# Altium PCB DDAQ.PcbDoc (part 1 of 2)
Units mil, origin at the board's own origin, x right, y up, seen from the top; angles counter-clockwise.
Board outline 3460 x 3375 mil, 2 copper layers (Top Layer, Bottom Layer); 150 components, 168 nets, 579 pads, 171 vias.
Unrouted connection lines stored in the file: 4.
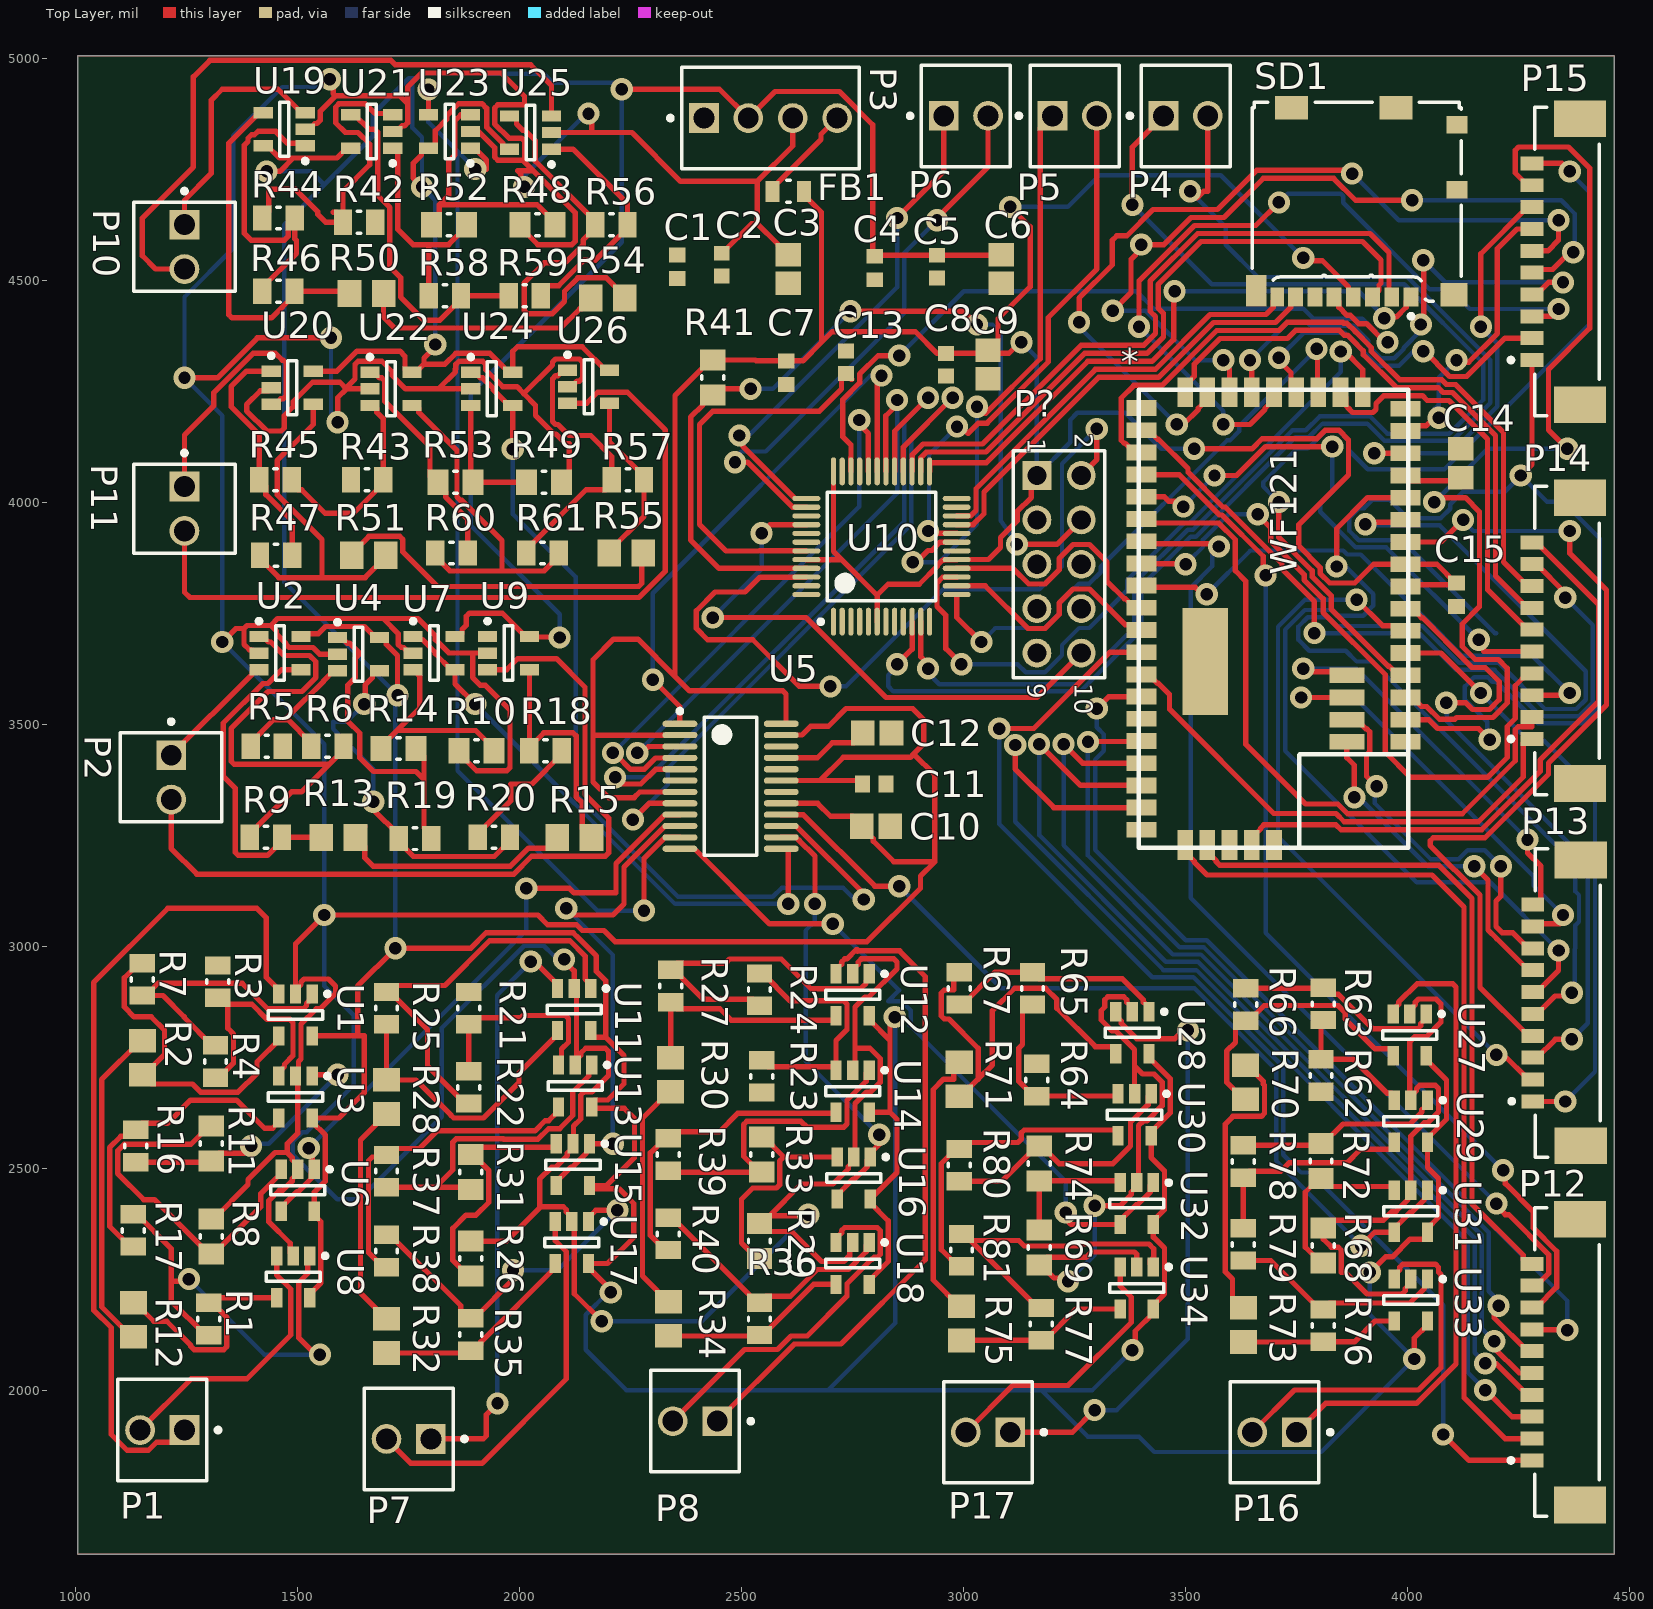
[diagram p0: Top Layer view]
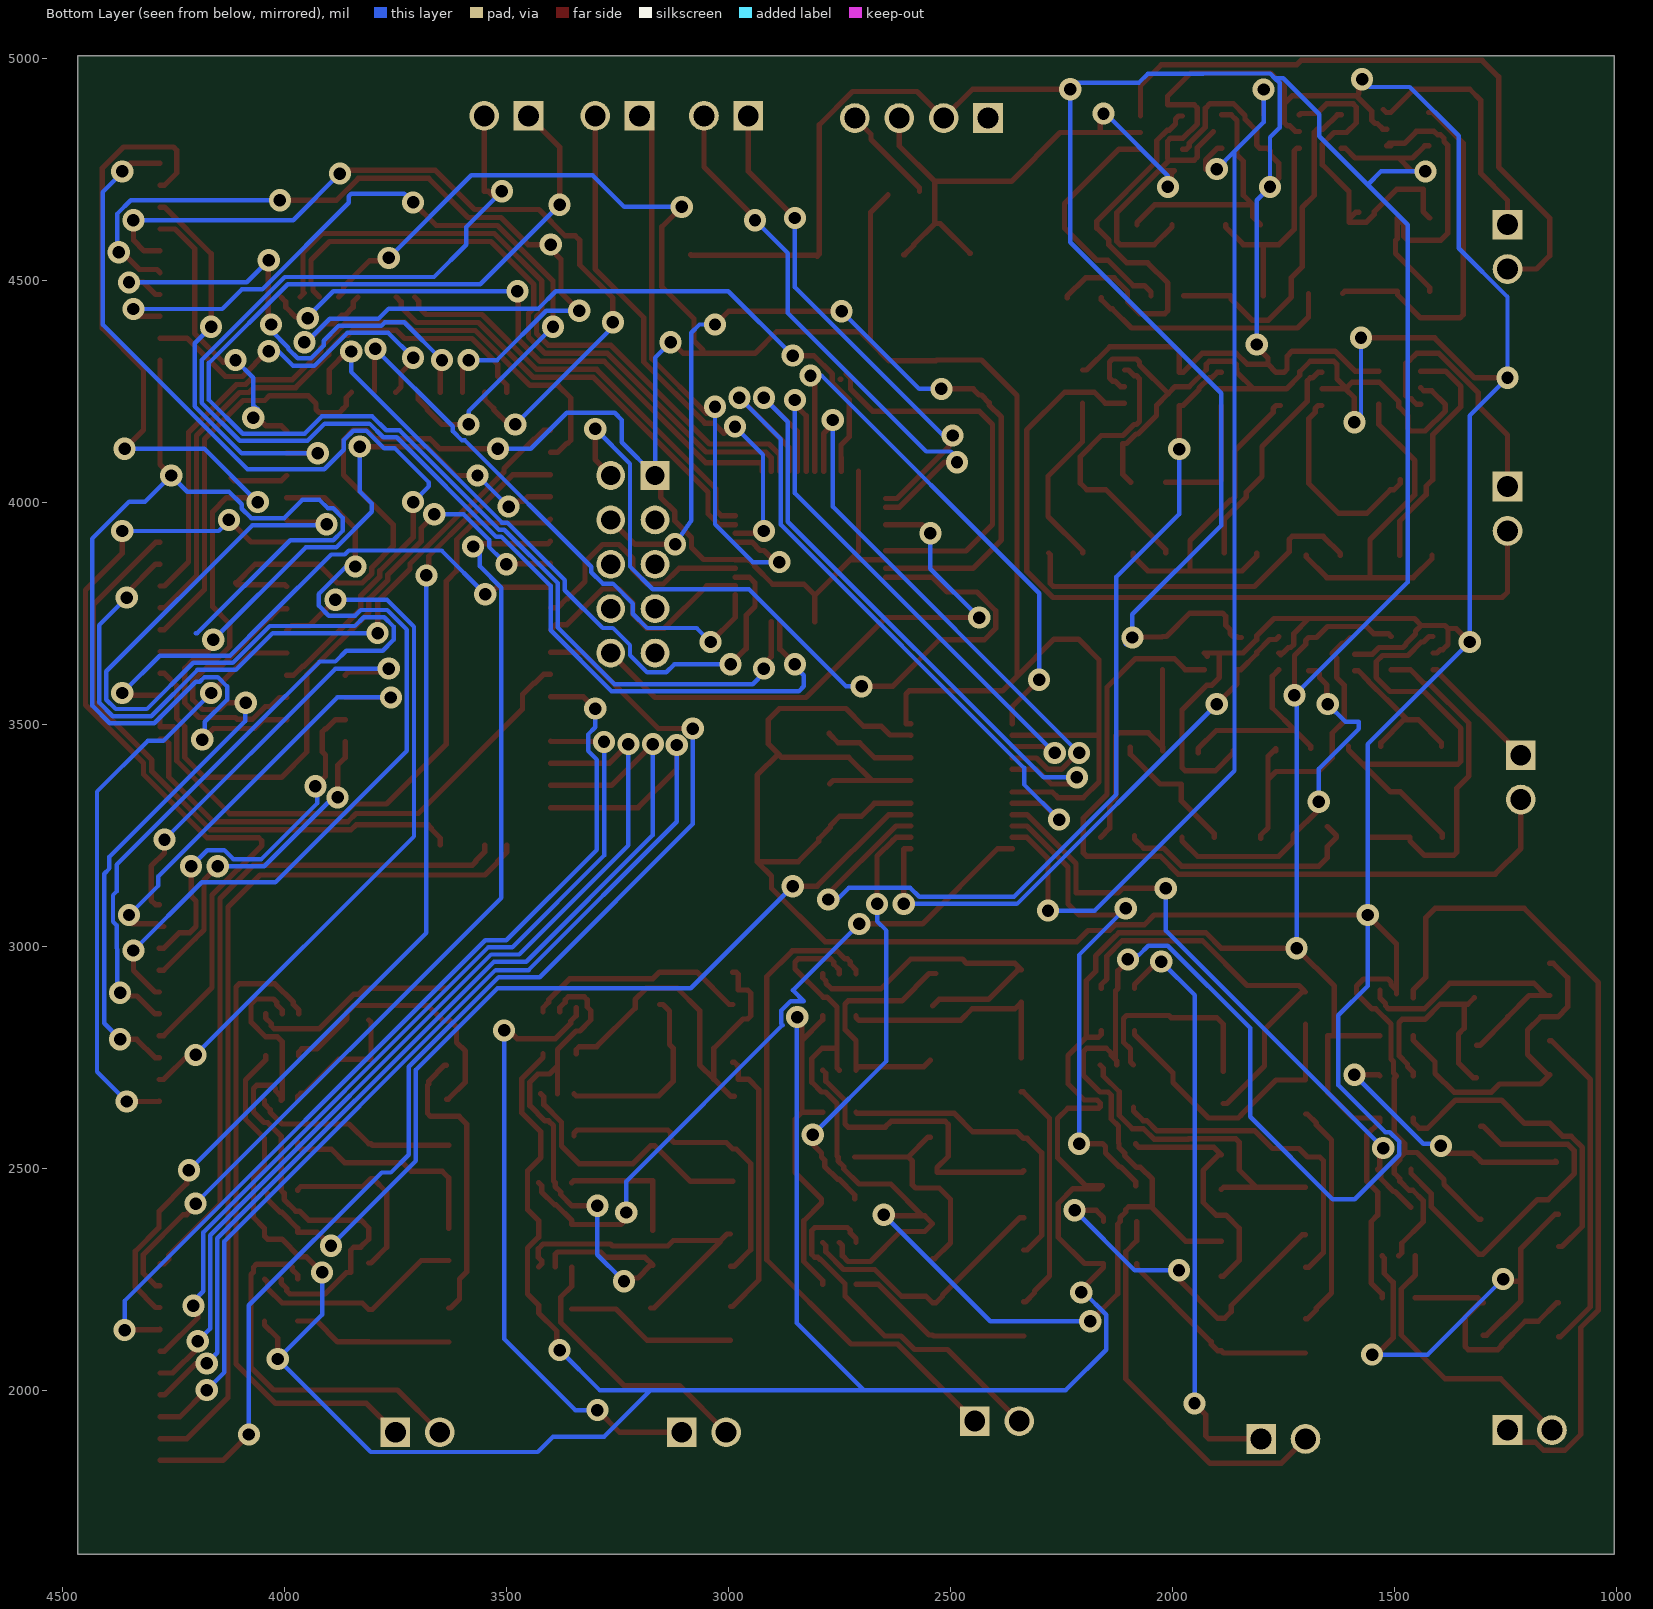
[diagram p1: Bottom Layer view, seen from below]

## Layer stack, top to bottom
Top Solder: solder mask 0.4, Solder Resist, Dk 3.5
Top Layer: signal copper 1.4
Dielectric 1: dielectric 12.6, FR-4, Dk 4.8
Bottom Layer: signal copper 1.4
Bottom Solder: solder mask 0.4, Solder Resist, Dk 3.5

## Board outline
1005,1630 4465,1630 4465,5005 1005,5005
cut-out: 4605,3700
cut-out: 1005,5005

## Design rules (kind name [scope] priority, off if disabled: settings)
Clearance [All] p1: gap=6 ignorepadtopadclearanceinfootprint=TRUE except(0: Arc-Hole Track-Hole SMDPad-Hole THPad-Hole Via-Hole Fill-Hole Poly-Hole Region-Hole Text-Hole; 1: SMDPad-SMDPad SMDPad-THPad SMDPad-Via SMDPad-Text THPad-THPad THPad-Via THPad-Text Via-Via Via-Text Fill-Text Poly-Text Region-Text Text-Text)
ComponentClearance [All] p1: gap=10 collisioncheckmode=3 verticalgap=100000 showdistances=FALSE
PolygonConnect [All] p1: connectstyle=Relief reliefconductorwidth=10 reliefentries=4 polygonreliefangle="90 Angle" airgapwidth=10
RoutingVias [All] p1: holewidth=28 width=50 viastyle="Through Hole" minholewidth=28 minwidth=50 maxholewidth=28 maxwidth=50
SolderMaskExpansion [All] p1: expansion=4
UnRoutedNet [All] p1: checkbadconnections=TRUE
Width [All] p1: maxlimit=20 minlimit=6 preferedwidth=12 bottomlayer_maxwidth=10 bottomlayer_prefwidth=10 minimp=50.000000 maximp=50.000000 favimp=50.000000
28 further rules are at their usual default settings.

## Components (designator, comment, footprint, x,y, rotation, side; value= is the part's Value field where it differs from the comment)
* "WF121" WF121 4000.91,3221.81 r90 top
C1 "10uF" CAPC1608X90X35NL10T15 2355,4530 r90 top
C2 "1uF" CAPC1608X90X35LL15T15 2455,4535 r90 top
C3 ".1uf" CAPC2013X94X50NL20T25 2605,4525 r90 top
C4 "10uF" CAPC1608X90X35NL10T15 2800,4527.28 r90 top
C5 "1uF" CAPC1608X90X35LL15T15 2940,4530.59 r90 top
C6 ".1uf" CAPC2013X94X50NL20T25 3085,4525 r90 top
C7 "10uF" CAPC1608X90X35NL10T15 2600,4291.57 r90 top
C8 "1uF" CAPC1608X90X35LL15T15 2960,4309.41 r90 top
C9 ".1uf" CAPC2013X94X50NL20T25 3055,4310 r90 top
C10 ".1uf" CAPC2013X94X50NL20T25 2802.52,3270 r180 top
C11 "10uF" CAPC1608X90X35NL10T15 2798.43,3365 r180 top
C12 ".1uf" CAPC2013X94X50NL20T25 2805,3480 r180 top
C13 "1uF" CAPC1608X90X35LL15T15 2735,4315 r90 top
C14 ".1uf" CAPC2013X94X50NL20T25 4120,4087.48 r270 top
C15 "10uF" CAPC1608X90X35NL10T15 4110,3791.57 r90 top
FB1 "MPZ2012S601A" TDK-MPZ2012_V 2605,4700 r180 top
P1 "22-27-2021" MOLX-22-27-2021_V 1195,1910 r180 top
P2 "22-27-2021" MOLX-22-27-2021_V 1215,3380 r270 top
P3 "22-27-2041" MOLX-22-27-2041_V 2565,4865 r180 top
P4 "22-27-2021" MOLX-22-27-2021_V 3500,4870 r0 top
P5 "22-27-2021" MOLX-22-27-2021_V 3250,4870 r0 top
P6 "22-27-2021" MOLX-22-27-2021_V 3005,4870 r0 top
P7 "22-27-2021" MOLX-22-27-2021_V 1750,1890 r180 top
P8 "22-27-2021" MOLX-22-27-2021_V 2395,1930 r180 top
P10 "22-27-2021" MOLX-22-27-2021_V 1245,4575 r270 top
P11 "22-27-2021" MOLX-22-27-2021_V 1245,3985 r270 top
P12 "53398-1071" MOLX-53398-1071_V 4348.9,2063.03 r270 top
P13 "53398-1071" MOLX-53398-1071_V 4350.63,2871.85 r270 top
P14 "53398-1071" MOLX-53398-1071_V 4348.9,3688.03 r270 top
P15 "53398-1071" MOLX-53398-1071_V 4348.9,4541.46 r270 top
P16 "22-27-2021" MOLX-22-27-2021_V 3700,1905 r180 top
P17 "22-27-2021" MOLX-22-27-2021_V 3055,1905 r180 top
P? "61301021121" 61301021121 3215,3860 r270 top
R1 "150kR" RESC2013X50X30NL20T20 1300,2160 r90 top
R2 "300kR" RESC2013X50X40ML20T20 1150,2748.39 r270 top
R3 "150kR" RESC2013X50X30NL20T20 1320,2920 r270 top
R4 "150kR" RESC2013X50X30NL20T20 1315,2740 r270 top
R5 "150kR" RESC2013X50X30NL20T20 1430.31,3450 r180 top
R6 "150kR" RESC2013X50X30NL20T20 1566.73,3450 r180 top
R7 "150kR" RESC2013X50X30NL20T20 1150,2925 r270 top
R8 "1MR" RESC2013X60X35ML10T20 1305,2345.47 r90 top
R9 "150kR" RESC2013X50X30NL20T20 1428.15,3245 r180 top
R10 "1MR" RESC2013X60X35ML10T20 1902.36,3440 r180 top
R11 "1MR" RESC2013X60X35ML10T20 1305,2555 r90 top
R12 "300kR" RESC2013X50X40ML20T20 1130,2158.39 r270 top
R13 "300kR" RESC2013X50X40ML20T20 1591.73,3245 r180 top
R14 "1MR" RESC2013X60X35ML10T20 1727.36,3445 r180 top
R15 "300kR" RESC2013X50X40ML20T20 2123.39,3245 r180 top
R16 "150kR" RESC2013X50X30NL20T20 1135,2549.69 r270 top
R17 "150kR" RESC2013X50X30NL20T20 1130,2359.69 r270 top
R18 "150kR" RESC2013X50X30NL20T20 2058.15,3440 r180 top
R19 "150kR" RESC2013X50X30NL20T20 1764.33,3242.17 r0 top
R20 "150kR" RESC2013X50X30NL20T20 1941.73,3245 r0 top
R21 "150kR" RESC2013X50X30NL20T20 1885,2860.32 r270 top
R22 "150kR" RESC2013X50X30NL20T20 1885,2681.73 r90 top
R23 "150kR" RESC2013X50X30NL20T20 2545,2706.73 r90 top
R24 "150kR" RESC2013X50X30NL20T20 2540,2901.73 r90 top
R25 "150kR" RESC2013X50X30NL20T20 1700,2860.32 r90 top
R26 "1MR" RESC2013X60X35ML10T20 1890,2295.95 r90 top
R27 "150kR" RESC2013X50X30NL20T20 2340,2910 r90 top
R28 "300kR" RESC2013X50X40ML20T20 1700,2660.12 r90 top
R29 "1MR" RESC2013X60X35ML10T20 2540,2335.31 r90 top
R30 "300kR" RESC2013X50X40ML20T20 2340,2710.31 r90 top
R31 "1MR" RESC2013X60X35ML10T20 1890,2490.95 r90 top
R32 "300kR" RESC2013X50X40ML20T20 1700,2121.93 r90 top
R33 "1MR" RESC2013X60X35ML10T20 2545,2530.31 r90 top
R34 "300kR" RESC2013X50X40ML20T20 2335,2160.31 r90 top
R35 "150kR" RESC2013X50X30NL20T20 1890,2125.32 r270 top
R36 "150kR" RESC2013X50X30NL20T20 2540,2160.31 r270 top
R37 "150kR" RESC2013X50X30NL20T20 1700,2493.15 r270 top
R38 "150kR" RESC2013X50X30NL20T20 1700,2313.15 r270 top
R39 "150kR" RESC2013X50X30NL20T20 2335,2530.63 r270 top
R40 "150kR" RESC2013X50X30NL20T20 2335,2352.05 r270 top
R41 "RC0805FR-071KL" RESC2013X60X35ML10T20 2435,4280.63 r90 top
R42 "150kR" RESC2013X50X30NL20T20 1638.58,4630 r180 top
R43 "150kR" RESC2013X50X30NL20T20 1656.42,4050.31 r0 top
R44 "150kR" RESC2013X50X30NL20T20 1456.73,4640 r180 top
R45 "150kR" RESC2013X50X30NL20T20 1450,4050.31 r0 top
R46 "150kR" RESC2013X50X30NL20T20 1456.42,4475 r180 top
R47 "150kR" RESC2013X50X30NL20T20 1451.42,3880.31 r0 top
R48 "1MR" RESC2013X60X35ML10T20 2040,4625 r180 top
R49 "1MR" RESC2013X60X35ML10T20 2054.37,4045 r0 top
R50 "300kR" RESC2013X50X40ML20T20 1655,4470 r180 top
R51 "300kR" RESC2013X50X40ML20T20 1660,3880.31 r0 top
R52 "1MR" RESC2013X60X35ML10T20 1840.63,4625 r180 top
R53 "1MR" RESC2013X60X35ML10T20 1855,4045 r0 top
R54 "300kR" RESC2013X50X40ML20T20 2198.39,4460 r180 top
R55 "300kR" RESC2013X50X40ML20T20 2240,3885.31 r0 top
R56 "150kR" RESC2013X50X30NL20T20 2206.42,4625 r180 top
R57 "150kR" RESC2013X50X30NL20T20 2243.58,4050.31 r0 top
R58 "150kR" RESC2013X50X30NL20T20 1831.42,4465 r180 top
R59 "150kR" RESC2013X50X30NL20T20 2011.42,4465 r180 top
R60 "150kR" RESC2013X50X30NL20T20 1846.42,3885.31 r0 top
R61 "150kR" RESC2013X50X30NL20T20 2051.42,3885.31 r0 top
R62 "150kR" RESC2013X50X30NL20T20 3805,2708.58 r90 top
R63 "150kR" RESC2013X50X30NL20T20 3810,2870 r270 top
R64 "150kR" RESC2013X50X30NL20T20 3165,2698.58 r270 top
R65 "150kR" RESC2013X50X30NL20T20 3155,2905 r270 top
R66 "150kR" RESC2013X50X30NL20T20 3635,2868.58 r90 top
R67 "150kR" RESC2013X50X30NL20T20 2990,2905 r270 top
R68 "1MR" RESC2013X60X35ML10T20 3810,2325.63 r90 top
R69 "1MR" RESC2013X60X35ML10T20 3170,2320.63 r270 top
R70 "300kR" RESC2013X50X40ML20T20 3635,2693.39 r270 top
R71 "300kR" RESC2013X50X40ML20T20 2990,2700 r270 top
R72 "1MR" RESC2013X60X35ML10T20 3805,2515.63 r270 top
R73 "300kR" RESC2013X50X40ML20T20 3630,2146.61 r90 top
R74 "1MR" RESC2013X60X35ML10T20 3170,2510.63 r270 top
R75 "300kR" RESC2013X50X40ML20T20 2995,2150 r90 top
R76 "150kR" RESC2013X50X30NL20T20 3810,2145 r270 top
R77 "150kR" RESC2013X50X30NL20T20 3175,2148.58 r270 top
R78 "150kR" RESC2013X50X30NL20T20 3630,2514.69 r90 top
R79 "150kR" RESC2013X50X30NL20T20 3630,2328.27 r90 top
R80 "150kR" RESC2013X50X30NL20T20 2990,2506.42 r270 top
R81 "150kR" RESC2013X50X30NL20T20 2995,2315 r270 top
SD1 "104031-0811" MOLX-104031-0811_V 3885,4675 r0 top
U1 "MCP601T-E/OT" SOT-23-OT5_N 1495,2845 r270 top
U2 "MCP601T-E/OT" SOT-23-OT5_N 1460,3660 r0 top
U3 "MCP601T-E/OT" SOT-23-OT5_N 1495,2660 r270 top
U4 "MCP601T-E/OT" SOT-23-OT5_N 1636.93,3657.6 r0 top
U5 "TLC3548IPW" TI-PW24_M 2475,3360 r0 top
U6 "MCP601T-E/OT" SOT-23-OT5_N 1500,2450 r270 top
U7 "MCP601T-E/OT" SOT-23-OT5_N 1807.24,3660 r0 top
U8 "MCP601T-E/OT" SOT-23-OT5_N 1490,2255 r270 top
U9 "MCP601T-E/OT" SOT-23-OT5_N 1975,3660 r0 top
U10 "ATSAMD21G18A-AU" ATML-TQFP48_M 2815,3900 r90 top
U11 "MCP601T-E/OT" SOT-23-OT5_N 2122.6,2857.24 r270 top
U12 "MCP601T-E/OT" SOT-23-OT5_N 2750,2890.31 r270 top
U13 "MCP601T-E/OT" SOT-23-OT5_N 2125,2685 r270 top
U14 "MCP601T-E/OT" SOT-23-OT5_N 2750,2673.07 r270 top
U15 "MCP601T-E/OT" SOT-23-OT5_N 2120,2507.76 r270 top
U16 "MCP601T-E/OT" SOT-23-OT5_N 2752.6,2477.56 r270 top
U17 "MCP601T-E/OT" SOT-23-OT5_N 2117.6,2332.24 r270 top
U18 "MCP601T-E/OT" SOT-23-OT5_N 2750,2285.31 r270 top
U19 "MCP601T-E/OT" SOT-23-OT5_N 1469.69,4840 r180 top
U20 "MCP601T-E/OT" SOT-23-OT5_N 1487.76,4257.6 r0 top
U21 "MCP601T-E/OT" SOT-23-OT5_N 1666.69,4834.8 r180 top
U22 "MCP601T-E/OT" SOT-23-OT5_N 1710,4255 r0 top
U23 "MCP601T-E/OT" SOT-23-OT5_N 1841.69,4834.8 r180 top
U24 "MCP601T-E/OT" SOT-23-OT5_N 1937.24,4255 r0 top
U25 "MCP601T-E/OT" SOT-23-OT5_N 2024.44,4832.4 r180 top
U26 "MCP601T-E/OT" SOT-23-OT5_N 2155,4260 r0 top
U27 "MCP601T-E/OT" SOT-23-OT5_N 4004.68,2800 r270 top
U28 "MCP601T-E/OT" SOT-23-OT5_N 3380,2805 r270 top
U29 "MCP601T-E/OT" SOT-23-OT5_N 4007.28,2605.51 r270 top
U30 "MCP601T-E/OT" SOT-23-OT5_N 3385,2620 r270 top
U31 "MCP601T-E/OT" SOT-23-OT5_N 4007.28,2402.76 r270 top
U32 "MCP601T-E/OT" SOT-23-OT5_N 3390,2420 r270 top
U33 "MCP601T-E/OT" SOT-23-OT5_N 4007.28,2202.76 r270 top
U34 "MCP601T-E/OT" SOT-23-OT5_N 3390,2230 r270 top

## Footprints (in the part's own frame and the unit in brackets; to place one, negate y for a bottom-side part, rotate by r counter-clockwise, add the part's x,y. Pads: shape width x height; smd on the part's side, far side on the other; paste and mask are expansions set on the pad)
61301021121 [mm] "Pin Header, pitch 2.54 mm, THT, Vertical, dual row, 10p"
  rect 1.65x1.65 hole 1.1: 1(-5.08,-1.27)
  round 1.65 hole 1.1: 2(-5.08,1.27) 3(-2.54,-1.27) 4(-2.54,1.27) 5(0,-1.27) 6(0,1.27) 7(2.54,-1.27) 8(2.54,1.27) 9(5.08,-1.27) 10(5.08,1.27)
  silkscreen extent -6.5,-2.62 6.5,2.62, body extent -6.35,-2.54 6.35,2.54, height 8.59
ATML-TQFP48_M [mm] "QFP, 48-Leads, Body 7x7mm, Pitch 0.5mm, IPC Low Density"
  oval 1.6x0.3 smd: 1(-4.3,2.75) 2(-4.3,2.25) 3(-4.3,1.75) 4(-4.3,1.25) 5(-4.3,0.75) 6(-4.3,0.25) 7(-4.3,-0.25) 8(-4.3,-0.75) 9(-4.3,-1.25) 10(-4.3,-1.75) 11(-4.3,-2.25) 12(-4.3,-2.75) 25(4.3,-2.75) 26(4.3,-2.25) 27(4.3,-1.75) 28(4.3,-1.25) 29(4.3,-0.75) 30(4.3,-0.25) 31(4.3,0.25) 32(4.3,0.75) 33(4.3,1.25) 34(4.3,1.75) 35(4.3,2.25) 36(4.3,2.75)
  oval 0.3x1.6 smd: 13(-2.75,-4.3) 14(-2.25,-4.3) 15(-1.75,-4.3) 16(-1.25,-4.3) 17(-0.75,-4.3) 18(-0.25,-4.3) 19(0.25,-4.3) 20(0.75,-4.3) 21(1.25,-4.3) 22(1.75,-4.3) 23(2.25,-4.3) 24(2.75,-4.3) 37(2.75,4.3) 38(2.25,4.3) 39(1.75,4.3) 40(1.25,4.3) 41(0.75,4.3) 42(0.25,4.3) 43(-0.25,4.3) 44(-0.75,4.3) 45(-1.25,4.3) 46(-1.75,4.3) 47(-2.25,4.3) 48(-2.75,4.3)
  silkscreen extent -4.42,-3.1 3.1,3.6, body extent -4.5,-4.5 4.5,4.5, height 1.2
CAPC1608X90X35LL15T15 [mm] "Chip Capacitor, 2-Leads, Body 1.60x0.81mm, IPC High Density"
  rect 0.85x0.9 smd: 1(-0.65,0) 2(0.65,0)
  body extent -0.88,-0.48 0.87,0.48, height 0.9
CAPC1608X90X35NL10T15 [mm] "Chip Capacitor, 2-Leads, Body 1.60x0.80mm, IPC Medium Density"
  rect 0.85x0.95 smd: 1(-0.675,0) 2(0.675,0)
  body extent -0.85,-0.45 0.85,0.45, height 0.9
CAPC2013X94X50NL20T25 [mm] "Chip Capacitor, 2-Leads, Body 2.01x1.25mm, IPC Medium Density"
  rect 1.35x1.45 smd: 1(-0.825,0) 2(0.825,0)
  body extent -1.1,-0.72 1.11,0.72, height 0.94
MOLX-22-27-2021_V [mm] "Header, 2-Leads, Body 5.8x5.08mm"
  rect 1.7x1.7 hole 1.19: 1(-1.27,0)
  round 1.7 hole 1.19: 2(1.27,0)
  silkscreen extent -3.32,-2.9 2.54,2.9, body extent -2.54,-2.9 2.54,2.9, height 11.72
MOLX-22-27-2041_V [mm] "CONN, 4-Leads, Body 10.16x5.8mm, Pitch 2.54mm"
  rect 1.7x1.7 hole 1.19: 1(3.81,0)
  round 1.7 hole 1.19: 2(1.27,0) 3(-1.27,0) 4(-3.81,0)
  silkscreen extent -5.08,-2.9 5.85,2.9, body extent -5.08,-2.9 5.08,2.9, height 11.7
MOLX-53398-1071_V [mm] "SMD, 10-Leads, Body 17.65x3.7mm, Pitch 1.25mm"
  rect 0.8x1.3 smd: 1(5.625,-1.75) 2(4.375,-1.75) 3(3.125,-1.75) 4(1.875,-1.75) 5(0.625,-1.75) 6(-0.625,-1.75) 7(-1.875,-1.75) 8(-3.125,-1.75) 9(-4.375,-1.75) 10(-5.625,-1.75)
  rect 2.1x3 smd: MP1(8.175,1) MP2(-8.175,1)
  silkscreen extent -8.83,-3.07 8.82,2.1, body extent -8.82,-2.1 8.83,2.1, height 4.77
MOLX-104031-0811_V [mm] "Micro SD, 8-Leads, Body 11.95x11.4mm, Pitch 1.1mm"
  rect 0.85x1.1 smd: 1(3.113,-5.412) 2(2.012,-5.412) 3(0.913,-5.412) 4(-0.188,-5.412) 5(-1.287,-5.412) 6(-2.387,-5.412) 7(-3.488,-5.412)
  rect 0.75x1.1 smd: 8(-4.538,-5.412)
  rect 1.2x1 smd: 9(5.748,0.738) 10(5.748,4.437)
  rect 1.55x1.35 smd: 11(5.573,-5.288)
  rect 1.17x1.8 smd: 12(-5.748,-5.063)
  rect 1.9x1.35 smd: 13(-3.723,5.412) 14(2.247,5.412)
  silkscreen extent -5.97,-6.64 5.98,5.74, body extent -5.97,-5.66 5.98,5.74, height 1.45
RESC2013X50X30NL20T20 [mm] "Chip Resistor, 2-Leads, Body 2.00x1.25mm, IPC Medium Density"
  rect 1.05x1.45 smd: 1(-0.925,0) 2(0.925,0)
  silkscreen extent -0.1,-0.62 0.1,0.62, body extent -1.1,-0.72 1.1,0.72, height 0.5
RESC2013X50X40ML20T20 [mm] "Chip Resistor, 2-Leads, Body 2.00x1.25mm, IPC Low Density"
  rect 1.35x1.55 smd: 1(-0.975,0) 2(0.975,0)
  body extent -1.1,-0.72 1.1,0.72, height 0.5
RESC2013X60X35ML10T20 [mm] "Chip Resistor, 2-Leads, Body 2.00x1.25mm, IPC Low Density"
  rect 1.2x1.45 smd: 1(-1,0) 2(1,0)
  silkscreen extent -0.1,-0.62 0.1,0.62, body extent -1.05,-0.67 1.05,0.67, height 0.6
SOT-23-OT5_N [mm] "SOT23, 5-Leads, Body 2.9x1.7mm, Pitch 0.95mm, Lead Span 2.8mm, IPC Medium Density"
  rect 1.1x0.65 smd: 1(-1.2,0.95) 2(-1.2,0) 3(-1.2,-0.95) 4(1.2,-0.95) 5(1.2,0.95)
  silkscreen extent -1.32,-1.55 0.25,1.95, body extent -0.9,-1.55 0.9,1.55, height 1.45
TDK-MPZ2012_V [mm] "SMD, 2-Leads, Body 2x1.25mm"
  rect 0.8x1.2 smd: 1(-0.9,0) 2(0.9,0)
  silkscreen extent -0.1,-0.62 0.1,0.62, body extent -1,-0.63 1,0.63, height 1.05
TI-PW24_M [mm] "SOP, 24-Leads, Body 7.8x4.4mm, Pitch 0.65mm, IPC Low Density"
  oval 2x0.35 smd: 1(-2.9,3.575) 2(-2.9,2.925) 3(-2.9,2.275) 4(-2.9,1.625) 5(-2.9,0.975) 6(-2.9,0.325) 7(-2.9,-0.325) 8(-2.9,-0.975) 9(-2.9,-1.625) 10(-2.9,-2.275) 11(-2.9,-2.925) 12(-2.9,-3.575) 13(2.9,-3.575) 14(2.9,-2.925) 15(2.9,-2.275) 16(2.9,-1.625) 17(2.9,-0.975) 18(2.9,-0.325) 19(2.9,0.325) 20(2.9,0.975) 21(2.9,1.625) 22(2.9,2.275) 23(2.9,2.925) 24(2.9,3.575)
  silkscreen extent -3.02,-3.95 1.5,4.42, body extent -2.25,-3.95 2.25,3.95, height 1.2
WF121 [mm]
  rect 0.9x1.7 smd: 1(6.05,0.15) 2(7.32,0.15) 3(8.59,0.15) 4(9.86,0.15) 5(11.13,0.15) 6(12.4,0.15) 7(13.67,0.15) 8(14.94,0.15) 9(16.21,0.15) 10(17.48,0.15) 11(18.75,0.15) 12(20.02,0.15) 13(21.29,0.15) 14(22.56,0.15) 15(23.83,0.15) 16(25.1,0.15) 26(25.15,15.25) 27(23.88,15.25) 28(22.61,15.25) 29(21.34,15.25) 30(20.07,15.25) 31(18.8,15.25) 32(17.53,15.25) 33(16.26,15.25) 34(14.99,15.25) 35(13.72,15.25) 36(12.45,15.25) 37(11.18,15.25) 38(9.91,15.25) 39(8.64,15.25) 40(7.37,15.25) 41(6.1,15.25) 42(4.83,15.25) 43(3.56,15.25) 44(2.29,15.25) 45(1.02,15.25)
  rect 1.7x0.9 smd: 17(26.05,2.59) 18(26.05,3.86) 19(26.05,5.13) 20(26.05,6.4) 21(26.05,7.67) 22(26.05,8.94) 23(26.05,10.21) 24(26.05,11.48) 25(26.05,12.75) 46(0.15,12.75) 47(0.15,11.48) 48(0.15,10.21) 49(0.15,8.94) 50(0.15,7.67)
  rect 6.1x2.6 smd: 51(10.65,11.6)
  rect 0.9x2 smd: 52(6.05,3.5) 53(7.32,3.5) 54(8.59,3.5) 55(9.86,3.5)
  silkscreen extent 0,0 26.2,15.4

## Part data
*: "WF121 WIFI Module.", ComponentLink1Description=Datasheet, ComponentLink1URL=https://www.silabs.com/documents/public/data-sheets/WF121-DataSheet.pdf
C1 C4 C7 C11 C15: library part CMP-2006-02792-1, Manufacturer=Murata, Part Number=GRM188R60J106ME47D
C2 C5 C8 C13: library part CMP-2006-04551-1, Manufacturer="AVX Interconnect / Elco", Part Number=0603ZC105KAT2A
C3 C6 C9 C10 C12 C14: library part CMP-2007-04454-1, Manufacturer="AVX Interconnect / Elco", Part Number=0805YC104KAT2A
FB1: library part CMP-2000-05400-1, "Chip Bead for Power Line, 600 Ohm, +/- 25%, 2 A, -55 to 125 degC, 2-Pin SMD (0805), RoHS, Tape and Reel", Case Height=0.85mm, Case Length=2mm, Case Width=1.25mm, Manufacturer=TDK, Maximum DC Current=2A, Maximum DC Resistance=100mOhms, Operating Temperature Range=-55Cto+125C, Package / Case=0805(2012metric), Package Description="2-Pin Surface Mount Device, Body 2 x 1.25 mm", Package Reference=805, Test Frequency=100MHz, Tolerance=25%, =MPZ2012S601AT000, Brand=TDK, Datasheet URL=https://datasheet.ciiva.com/23763/1750041-23763249.pdf, Datasheet Version=Jul-13, Dimensions=1.25mmWx2mmLx0.85mmH, Factory Pack Quantity=4000, Impedance=600Ohms, Manufacturer URL=http://www.tdk.com/, Packaging=Reel, Product=FerriteChipBeads, Product Category=EMIFilterBeads,Chips&Arrays, RoHS=Details, Termination Style=SMD/SMT
P1 P2 P4 P5 P6 P7 P8 P10 P11 P16 P17: library part CMP-2000-05537-1, "Male Header, Pitch 2.54 mm, 1 x 2 Position, Height 11.7 mm, Tail Length 3.56 mm, 0 to 75 degC, RoHS, Bulk", Current - Max=4A, Manufacturer=Molex, Operating temperature=0°Cto+75°C, Package Description="2-Leads Header, Body 5.08 x 5.8 mm, Pitch 2.54 mm", Package Version="Rev. BC, 02/2012", PartNumber=0022272021, Voltage - Max=250V, Contact material=Tinplatedbrass, Current rating=4A, Datasheet URL=http://www.molex.com/pdm_docs/sd/022272021_sd.pdf, Datasheet Version="Rev. F, 06/2009", Housing material=Nylon(UL94V-0), Manufacturer URL=http://www.molex.com/, Mounting Technology=ThroughHole, No. of Positions=2, No. of Rows=1, Orientation=Vertical, Package Reference=22-27-2021, Pitch=2.54mm, Voltage rating=250V
P3: library part CMP-2000-05243-1, "Male Header, Pitch 2.54 mm, 1 x 4 Position, Height 11.7 mm, Tail Length 3.56 mm, RoHS, Bulk", Current rating=4A, Manufacturer=Molex, Operating temperature=0degCto+75degC, Voltage rating=250V, Contact material=Tinplatedbrass, Datasheet URL=http://www.molex.com/pdm_docs/sd/022272041_sd.pdf, Datasheet Version="Rev. F, 06/2009", Housing material=Nylon(UL94V-0), Manufacturer URL=http://www.molex.com/
P12 P13 P14 P15: library part CMP-2000-05635-1, "Male Header, Pitch 1.25 mm, 1 x 10 Position, Height 4.7 mm, -40 to 85 degC, RoHS, Tape and Reel", Current rating=1A, Manufacturer=Molex, Package Description="Male Header, Pitch 1.25 mm, 1 x 10 Position, Height 4.7 mm", Voltage rating=125V, =0533981071, Brand=Molex, Contact Gender=Pin(Male), Contact material=PhosphorBronze, Contact Plating=Tin, Datasheet URL=http://www.molex.com/pdm_docs/sd/533981071_sd.pdf, Datasheet Version="Rev. J, 09/2015", Factory Pack Quantity=1000, Housing material=Nylon, Manufacturer URL=http://www.molex.com/, Mounting Angle=Vertical, Mounting Style=SMD, Mounting Technology=SurfaceMount, Number of Positions=10Position, Number of Rows=1Row, Package Reference=53398-1071, Packaging=Reel, Pitch=1.25mm, Product=Headers, Product Category=Headers&WireHousings, RoHS=Details, Series=53398, Termination Style=SMD, Tradename=PicoBlade, Type=Shrouded
P?: library part CMP-1502-01084-1, "THT Vertical Pin Header WR-PHD, Pitch 2.54 mm, Dual Row, 10 pins", Contact Resistance=20mOhm, Manufacturer="Wurth Elektronik", Operating temperature=-40to105degC, Rated Current=3A, Withstanding Voltage=500VAC, Working Voltage=250VAC, Datasheet URL=https://katalog.we-online.de/em/datasheet/6130xx21121.pdf, Gender=Male, Manufacturer URL=http://www.we-online.de, Mounting Technology=THT, Orientation=Vertical, Package Reference=61301021121, Packaging=Bag, Part Number=61301021121, Pin Number=10, Pitch=2.54mm, Publisher=WurthElektronik, Row Number=Dual
R1 R3 R4 R5 R6 R7 R9 R16 R17 R18 R19 R20 R21 R22 R23 R24 R25 R27 R35 R36 R37 R38 R39 R40 R42 R43 R44 R45 R46 R47 R56 R57 R58 R59 R60 R61 R62 R63 R64 R65 R66 R67 R76 R77 R78 R79 R80 R81: library part CMP-2001-04961-1, Manufacturer="Vishay Dale", Part Number=CRCW0805150KFKTA
R2 R12 R13 R15 R28 R30 R32 R34 R50 R51 R54 R55 R70 R71 R73 R75: library part CMP-2001-04851-1, Manufacturer=Susumu, Part Number=RG2012N-304-W-T1
R8 R10 R11 R14 R26 R29 R31 R33 R48 R49 R52 R53 R68 R69 R72 R74: library part CMP-2001-01491-1, Manufacturer=Yageo, Part Number=RT0805BRE071ML
R41: library part CMP-2100-03671-1, "Chip Resistor, 1 KOhm, +/- 1%, 125 mW, -55 to 155 degC, 0805 (2012 Metric), RoHS, Tape and Reel", Case/Package=0805, Case Code (Metric)=2012, Manufacturer=Yageo, Max Operating Temperature=155degC, Max Power Dissipation=125mW, Min Operating Temperature=-55degC, Package Description="2-Pin Surface Mounted Device, Body 2 x 1.25 mm", Package Quantity=1, Resistance=1KOhm, Temperature Coefficient=100ppm/degreesC, Tolerance=1%, Voltage rating=150V, Case Code (Imperial)=0805, Composition=ThickFilm, Datasheet URL=http://www.yageo.com/NewPortal/yageodocoutput?fileName=/pdf/R-Chip/PYu-RC_Group_51_RoHS_L_5.pdf, Datasheet Version="Rev. 5, 10/2016", Depth=1.25mm, Height=0.024inch, Lead Free=LeadFree, Length=0.079inch, Manufacturer URL=http://www.yageo.com/, Military Standard=Not, Number of Pins=2, Number of Terminations=2, Package Reference=0805, Packaging=TapeandReel, Power Rating=125mW, REACH SVHC=Unknown, RoHSCompliant=true, Termination=SMD/SMT, Voltage Rating (DC)=150V, Width=0.049inch
SD1: library part CMP-2000-05825-1, "Micro SD Card, RA, -25 to 85 degC, 8-Pin SMD, RoHS, Tape and Reel", Current rating=500mA, Manufacturer=Molex, Package Description="8-Pin Surface Mount Device, Body 11.95 x 11.4 mm, Pitch 1.1 mm", Voltage rating=10VAC/DC, Brand=Molex, Card Type=microSD, Contact material=PhosphorBronze, Contact Plating=Gold, Datasheet URL=http://www.molex.com/pdm_docs/sd/1040310811_sd.pdf, Datasheet Version="Rev. E, 04/2006", Height=1.42mm, Housing material=LiquidCrystalPolymer(LCP), Insertion - Extraction Style=Push-Pull, Length=11.4mm, Manufacturer URL=http://www.molex.com/, Mating Cycles=10000, Mounting Technology=SurfaceMount, Mounting Type=Standard, Number of Contacts=8, Number of Rows=1Row, Orientation=RightAngle, Package Reference=104031-0811, Packaging=Reel, Pitch=1.1mm, Product=CardConnectors, Product Category=MemoryCardConnectors, RoHS=True, Series=104031, Termination Style=SMD
U1 U2 U3 U4 U6 U7 U8 U9 U11 U12 U13 U14 U15 U16 U17 U18 U19 U20 U21 U22 U23 U24 U25 U26 U27 U28 U29 U30 U31 U32 U33 U34: library part CMP-0187-00431-2, "2.7V to 6.0V Single Supply CMOS Operational Amplifier, 5-Pin SOT-23, Extended Temperature, Tape and Reel", Code_IPC=SOT23-5, ComponentLink1Description="Manufacturer URL", ComponentLink1URL=http://www.microchip.com/, ComponentLink2Description=Datasheet, ComponentLink2URL=http://ww1.microchip.com/downloads/en/DeviceDoc/21314g.pdf, ComponentLink3Description="Package Specification", ComponentLink3URL=http://www.microchip.com/stellent/groups/techpub_sg/documents/packagingspec/en012702.pdf, DatasheetVersion="revG, Dec-2007", PackageDescription="5-Lead Plastic Small Outline Transistor (OT) [SOT-23]", PackageReference=SOT-23-OT5, PackageVersion="revBB, Aug-2009", RevisionNote="URLs added."
U5: library part CMP-0003-02018-1, "14-Bit, 5 V, 200 kSPS, 8-Channel Unipolar ADC, -40 to 85 degC, 24-pin SOP (PW24), Green (RoHS & no Sb/Br)", Analog Voltage AV/DD(Max)(V)=5.5, Analog Voltage AV/DD(Min)(V)=4.5, Manufacturer="Texas Instruments", # Input Channels=8, Architecture=SAR, Code_JEDEC=MO-153, ComponentLink1Description="Manufacturer URL", ComponentLink1URL=http://www.ti.com/, ComponentLink2Description=Datasheet, ComponentLink2URL=http://www.ti.com/general/docs/lit/getliterature.tsp?genericPartNumber=TLC3548&fileType=pdf, ComponentLink3Description="Package Specification", ComponentLink3URL=http://www.ti.com/litv/pdf/mpds363, DatasheetVersion=SLAS266C, Digital Supply(Max)(V)=5.5, Digital Supply(Min)(V)=2.7, Eco-Plan="Green (RoHS & no Sb/Br)", ENOB(Bits)=13.1, INL(Max)(+/-LSB)=1, Interface="Serial SPI", Mounting Technology="Surface Mount", PackageDescription="24-Pin Plastic Small Outline, Body 7.8 x 4.4 mm, Pitch 0.65 mm", PackageReference=PW24, PackageVersion="4040064-6/G, 02/2011", PartNumber=TLC3548IPW, Resolution(Bits)=14, Sample Rate (max)(SPS)=200k, SFDR(dB)=97, SINAD(dB)=80.8, SNR(dB)=81, SubFamily="Precision ADC (<=10MSPS)"
U10: library part CMP-2100-03585-1, "SMART ARM-Based Microcontroller, 1.62 to 3.63 V, 256 KB Flash, 32 KB SRAM, -40 to 85 degC, 48-Pin TQFP, RoHS, Tray", Case/Package=TQFP, Frequency=48MHz, Manufacturer=Atmel, Max Operating Temperature=85degC, Max Supply Voltage=3.63V, Min Operating Temperature=-40degC, Min Supply Voltage=1.62V, Package Description="48-Pin Thin Profile Plastic Quad Flat Package, Body 7 x 7 mm, Pitch 0.5 mm", Package Reference=TQFP48, Contact Plating=Tin, Datasheet URL=http://www.atmel.com/images/atmel-42181-sam-d21_datasheet.pdf, Datasheet Version="Rev. N, 10/2016", Lead Free=LeadFree, Manufacturer URL=http://www.atmel.com/, Max Frequency=48MHz, Mount=SurfaceMount, Number of Pins=48, Number of Timers/Counters=6, Packaging=Tray, REACH SVHC=NoSVHC, RoHSCompliant=true

## Via types
v1: diameter 50, hole 28, Top Layer to Bottom Layer, 171 vias

## Nets (pads, with @x,y where several pads share a name; then routed paths per layer and width w, separated by ;. In a path a pad name is that pad's centre, name@x,y a point inside that pad or via, vN(x,y) a via of type N, cw(c..) or ccw(c..) an arc to the next point about the centre after c; other vN are vias at no path point)
3.3V: *.8 *.9 C7.2 C8.2 C9.2 C15.2 FB1.1 P?.1 R41.2 SD1.4 U5.2 U5.7 U5.24 U10.6 U10.17 U10.36 U10.44 | length 7403
  Top Layer w12: U5.7@2360.83,3347.2 2360.62,3347 2270.52,3347 2257.83,3334.31 2200.69,3334.31 2165,3370 2165,3475 ; U5.2@2360.83,3475.16 2165.16,3475.16 2165,3475 ; U5.24@2589.17,3500.75 2599.18,3500.75 2600,3501.57 2600,3567.97 2592.97,3575 2382.56,3575 2350,3607.56 ; FB1.1@2640.43,4692.13 2680,4652.56 2680,4360 ; U10.44@2645.71,3870.47 2724.84,3870.47 ; U10.36@2706.73,4069.29 2706.73,3888.58 2724.84,3870.47 ; U10.6@2805.16,3730.71 2805.16,3790.16 ; C9.2@3056.97,4342.48 3077.54,4363.05 3077.54,4412.97 3150,4485.43 3150,4620 v1(3105,4665) ; v1(3130,4360) 3126.54,4360 3101.54,4335 3055,4335 C8.2@2960,4335 2940,4335 2891.27,4383.73 2703.73,4383.73 2680,4360 ; P?.1@3165,4060 3152.5,4047.5 3152.5,4010.4 3120.52,3978.42 3120.52,3957.85 3083,3920.33 3083,3898 3055.57,3870.57 2984.39,3870.57 U10.17@2984.29,3870.47 2955.47,3870.47 2953.69,3868.69 2951.28,3868.69 2940.8,3858.2 2940.8,3855.8 2900,3815 2830,3815 2805.16,3790.16 ; v1(3519,4120) 3649.54,4120 3672.54,4143 3795.67,4143 3814.67,4162 3845.33,4162 3867,4140.33 3867,4061.29 3755,3949.29 3755,3900.91 3803,3852.91 3803,3839.67 3824.67,3818 3880.96,3818 3922.96,3860 *.9@3995,3860 4066.18,3860 4108.03,3818.15 C15.2@4110,3818.15 4105.93,3814.07 3999.07,3814.07 *.8@3995,3810 ; v1(3765,4550) 3771.42,4543.58 3808,4543.58 3866.89,4484.69 3866.89,4472.64 SD1.4@3877.62,4461.91 ; 2165,3475 2165,3645 2211.28,3691.28 2266.28,3691.28 2350,3607.56 ; 2350,3607.56 2350,4239.92 2430.08,4320 R41.2@2435,4320 2531.3,4320 2533.15,4318.15 C7.2@2600,4318.15 2638.15,4318.15 2680,4360 ; 2724.84,3870.47 2805.16,3790.16
  Bottom Layer w10: v1(3105,4665) 3234.87,4665 3305.87,4736 3579,4736 v1(3765,4550) ; v1(3130,4360) 3165,4325 P?.1@3165,4060 3240,4135 3240,4185 3256,4201 3364.13,4201 3445.13,4120 v1(3519,4120)
+5V: C1.2 C2.2 C3.2 C10.2 C11.2 P3.3 R8.2 R10.2 R26.2 R29.2 R48.2 R49.2 R68.2 R69.2 U1.2 U2.2 U3.2 U4.2 U5.17 U5.19 U5.23 U6.2 U7.2 U8.2 U9.2 U11.2 U12.2 U13.2 U14.2 U15.2 U16.2 U17.2 U18.2 U19.2 U20.2 U21.2 U22.2 U23.2 U24.2 U25.2 U26.2 U27.2 U28.2 U29.2 U30.2 U31.2 U32.2 U33.2 U34.2 | length 20569.4
  Top Layer w12: v1(1245,4280) 1319.09,4280 1409.09,4370 v1(1575,4370) ; R8.2@1305,2384.84 1309.92,2384.84 1388.24,2463.16 1388.24,2474.3 1448.93,2535 1476.26,2535 ; v1(1330,3685) 1330.48,3685 1360.64,3715.17 1379.1,3715.17 ; U2.2@1412.76,3660 1403.9,3660 1396.14,3667.76 1390.98,3667.76 1379.1,3679.64 1379.1,3715.17 ; U20.2@1440.51,4257.6 1433.72,4250.8 1415.8,4250.8 1384.97,4219.97 1384.97,4205.49 1430.46,4160 1462.97,4160 1470,4167.03 1470,4195 1490,4215 1490,4226.62 1533.38,4270 1595,4270 1610,4255 ; U8.2@1490,2302.24 1483.2,2309.04 1483.2,2330.73 1435,2378.94 1435,2426.58 1458.42,2450 1466.77,2450 1487.39,2470.62 1487.39,2475.78 1500,2488.39 U6.2@1500,2497.24 1500,2506.1 1487.39,2518.71 1487.39,2523.87 1476.26,2535 ; U1.2@1495,2892.24 U1.2@1495,2901.1 ; U19.2@1516.93,4840 1525.79,4840 1538.39,4852.6 1543.55,4852.6 1550.58,4859.63 1550.58,4880.22 1585.36,4915 ; v1(1572.5,4952.5) 1579.77,4945.23 1579.77,4920.59 1585.36,4915 ; U4.2@1589.68,3657.6 1549.12,3657.6 1534.11,3672.61 1480.62,3672.61 1473.59,3679.64 1473.59,3681.41 1452.19,3702.81 1452.19,3709.39 1439.38,3722.2 ; v1(1590,4180) 1590,4235 1610,4255 ; U22.2@1662.76,4255 1610,4255 ; U21.2@1713.93,4834.8 1722.79,4834.8 1735.39,4847.41 1740.55,4847.41 1747.58,4854.44 1747.58,4897.42 ; U7.2@1755.64,3655.64 U7.2@1760,3660 1751.14,3660 1738.54,3672.61 1733.38,3672.61 1726.35,3679.64 1726.35,3704.25 1692.8,3737.8 ; R10.2@1862.99,3440 1862.99,3435.08 1903.07,3395 1971,3395 1978.03,3402.03 1978.03,3531.97 1922.58,3587.42 1911.52,3587.42 1894.1,3604.83 1894.1,3659.1 1895,3660 ; R26.2@1890,2335.32 1970.32,2335.32 2048.14,2413.14 ; U24.2@1898.86,4255 U24.2@1890,4255 1816.61,4255 ; U23.2@1907.54,4834.8 1943.54,4798.8 1943.54,4777.23 1950.57,4770.2 2006.8,4770.2 ; U9.2@1920.96,3653.2 U9.2@1927.76,3660 1895,3660 ; R48.2@2000.63,4625 2000.63,4620.08 2040.71,4580 2117.97,4580 2125,4587.03 2125,4652 2031,4746 ; v1(2010,4710) 2002.73,4717.27 2002.73,4739.27 1996,4746 2031,4746 ; U25.2@2071.69,4832.4 2162.27,4832.4 ; R49.2@2093.74,4045 2111.36,4062.62 2111.36,4131.95 2103.05,4131.95 2081.74,4153.26 2077.41,4153.26 2035.46,4195.22 2035.46,4218.05 2009.25,4244.25 ; v1(2100,2970) 2100,2966.74 2122.6,2944.14 U11.2@2122.6,2904.49 2127.99,2899.1 U13.2@2127.99,2744.09 ; U26.2@2107.76,4260 2116.61,4260 2129.22,4272.61 2134.38,4272.61 2141.41,4279.64 2141.41,4315.17 2134.38,4322.2 2081.13,4322.2 2074.1,4315.17 2074.1,4309.1 2009.25,4244.25 ; U13.2@2125,2732.24 2125,2741.1 U13.2@2127.99,2744.09 ; v1(2155,4875) 2162.27,4867.73 2162.27,4832.4 ; v1(2185,2155) 2122.99,2217.01 2122.99,2374.1 U17.2@2117.6,2379.49 2117.6,2388.35 2104.99,2400.95 2104.99,2406.11 2097.96,2413.14 2048.14,2413.14 ; C2.2@2455,4560.59 2455.98,4560.59 2522.87,4627.48 2535,4627.48 ; U5.17@2589.17,3321.61 2671.27,3321.61 2700.34,3292.54 2749.47,3292.54 2770.04,3271.97 C10.2@2770.04,3270 2770.04,3268.03 2796.43,3241.65 2796.43,3236.49 2842.91,3190 2935,3190 ; U5.19@2589.17,3372.8 2676.61,3372.8 ; U5.23@2589.17,3475.16 2589.51,3475.5 2635.5,3475.5 2655,3495 2695,3495 2735,3535 2885,3535 2910,3510 2910,3455 2887.5,3432.5 ; C3.2@2605,4557.48 2603.03,4557.48 2582.46,4578.05 2582.46,4580.02 2535,4627.48 ; P3.3@2615,4865 2615,4802.57 2535,4722.57 ; v1(2650,2395) 2647.31,2392.31 R29.2@2562.54,2392.31 ; U18.2@2750,2332.56 2743.2,2325.76 2743.2,2302.65 2730.28,2289.72 2680.08,2289.72 2612.74,2357.06 2557.62,2357.06 R29.2@2540,2374.68 2557.62,2392.31 R29.2@2562.54,2392.31 ; U14.2@2750,2720.31 2755.39,2725.71 2755.39,2770 ; U12.2@2750,2937.56 2750,2946.42 2762.61,2959.02 2762.61,2964.18 2769.64,2971.21 2842.97,2971.21 2850,2964.18 2850,2948.74 2786.26,2885 2777.91,2885 2755.39,2862.48 2755.39,2770 ; C11.2@2771.85,3365 2764.05,3372.8 2676.61,3372.8 ; v1(3235,2245) 3227.73,2252.27 3203.91,2252.27 3174.92,2281.26 R69.2@3170,2281.26 3187.62,2298.88 3275.45,2298.88 3287.46,2310.9 3384.82,2310.9 3390,2305.72 U34.2@3390,2277.24 ; v1(3295,2415) 3351.77,2415 3377.39,2440.62 3377.39,2445.78 3390,2458.39 U32.2@3390,2467.24 3393.93,2471.18 3393.93,2595.71 3404.64,2606.41 3412.99,2606.41 3447.2,2640.62 3447.2,2693.87 3429.13,2711.93 3403.07,2711.93 3385,2730 ; U28.2@3380,2852.24 3380,2861.1 3367.39,2873.71 3367.39,2878.87 3360.36,2885.9 3324.83,2885.9 3317.8,2878.87 3317.8,2862.8 3310,2855 3310,2833.42 3334.52,2808.9 3342.87,2808.9 3385,2766.77 3385,2730 ; U30.2@3385,2667.24 3385,2730 ; U27.2@4004.68,2847.24 4004.68,2856.1 4017.29,2868.71 4017.29,2873.87 4024.32,2880.9 4064.1,2880.9 4075,2870 4075,2828.74 4041.85,2795.59 4015.59,2795.59 4005,2785 4005,2655.04 U29.2@4007.28,2652.76 4007.28,2661.61 4019.89,2674.22 4019.89,2679.38 4026.92,2686.41 4062.45,2686.41 4069.48,2679.38 4069.48,2626.13 4045.95,2602.61 4037.6,2602.61 4007.28,2572.29 U31.2@4007.28,2450 4000.49,2443.21 4000.49,2429.19 3974.3,2403 3965.95,2403 3945.57,2382.62 3827.62,2382.62 R68.2@3810,2365 3810,2340 3828.12,2321.88 3843.51,2321.88 3850.54,2314.85 3850.54,2264.67 3860.33,2264.67 3908.65,2216.35 3987.65,2216.35 3994.67,2223.38 3994.67,2228.54 4007.28,2241.14 U33.2@4007.28,2250 ; 1379.1,3715.17 1386.13,3722.2 1439.38,3722.2 ; 1439.38,3722.2 1454.98,3737.8 1692.8,3737.8 ; 1476.26,2535 1476.26,2554.55 1500.39,2578.68 1500.39,2701.85 U3.2@1495,2707.24 1501.8,2714.04 1501.8,2740 1507.61,2745.82 1507.61,2824.38 1541.82,2858.59 1550.17,2858.59 1585,2893.42 1585,2910 1569.1,2925.9 1514.64,2925.9 1507.61,2918.87 1507.61,2913.71 U1.2@1495,2901.1 ; U1.2@1495,2901.1 1495,3005 v1(1560,3070) 2041,3070 2063,3048 2127.91,3048 2140.91,3035 2190,3035 2215,3010 2782.33,3010 2902.66,3130.34 2902.66,3157.66 2935,3190 ; 1585.36,4915 1730,4915 1747.58,4897.42 ; 1610,4255 1610,4258.09 1629.1,4277.2 1629.1,4310.17 1636.13,4317.2 1689.38,4317.2 1712.91,4293.67 1712.91,4285.32 1743.23,4255 1816.61,4255 ; 1692.8,3737.8 1771.03,3737.8 1810.15,3698.67 1810.15,3690.32 1840.47,3660 1895,3660 ; 1747.58,4897.42 1747.58,4934.91 1779.12,4966.44 1958.56,4966.44 2010.85,4914.15 2010.85,4895 1950.98,4895 1943.54,4887.57 1943.54,4852.04 1975.79,4819.79 2003.82,4819.79 2010.85,4812.76 2010.85,4774.26 2006.8,4770.2 ; 1816.61,4255 1855,4293.39 1855,4299.2 1856.35,4300.54 1856.35,4310.17 1863.38,4317.2 1916.62,4317.2 1923.65,4310.17 1923.65,4298.22 1961.88,4260 1993.51,4260 2009.25,4244.25 ; 2006.8,4770.2 2031,4746 ; 2048.14,2413.14 2045,2416.28 2045,2475 2071.69,2501.69 2080.7,2501.69 2107.39,2528.38 2107.39,2533.54 2120,2546.14 U15.2@2120,2555 2121.37,2556.37 2121.37,2594.65 2137.61,2610.89 2137.61,2664.38 2144.64,2671.41 2162.55,2671.41 2200,2708.86 2200,2762.97 2192.97,2770 2148.74,2770 2137.61,2758.87 2137.61,2753.71 U13.2@2127.99,2744.09 ; 2162.27,4832.4 2252.86,4832.4 2362.69,4722.57 2535,4722.57 ; 2535,4627.48 2535,4722.57 ; R29.2@2562.54,2392.31 2634.2,2463.97 2705.78,2463.97 2739.99,2498.18 2739.99,2503.34 2752.6,2515.94 U16.2@2752.6,2524.8 2755.39,2527.6 2755.39,2645.24 2781.62,2671.46 2789.97,2671.46 2812.2,2693.69 2812.2,2746.94 2789.14,2770 2755.39,2770 ; 2676.61,3372.8 2728.82,3425 2880,3425 2887.5,3432.5 ; 2887.5,3432.5 2935,3385 2935,3190
  Bottom Layer w10: v1(1572.5,4952.5) 1555,4935 1465,4935 1355,4825 1355,4572.12 1245,4462.12 v1(1245,4280) 1330,4195 v1(1330,3685) 1560,3455 v1(1560,3070) 1560,2910.13 1626,2844.13 1626,2687 1520,2581 1510.09,2581 1489,2559.91 1489,2530.09 1589.09,2430 1639.14,2430 1824.62,2615.47 1824.62,2815.53 2010.09,3001 2054,3001 2075,2980 2090,2980 v1(2100,2970) ; v1(1575,4370) 1575,4195 v1(1590,4180) ; v1(2010,4710) 2010,4735 v1@2145,4870 ; v1(2185,2155) 2410,2155 v1(2650,2395) ; v1@3240,2250 3295,2305 v1(3295,2415)
-5V: C4.2 C5.2 C6.2 P3.2 U1.5 U2.5 U3.5 U4.5 U6.5 U7.5 U8.5 U9.5 U11.5 U12.5 U13.5 U14.5 U15.5 U16.5 U17.5 U18.5 U19.5 U20.5 U21.5 U22.5 U23.5 U24.5 U25.5 U26.5 U27.5 U28.5 U29.5 U30.5 U31.5 U32.5 U33.5 U34.5 | length 17002.6
  Top Layer w12: U19.5@1422.44,4802.6 1431.3,4802.6 1458.9,4775 1490,4775 ; v1@1445,4745 1460,4745 1490,4775 ; U2.5@1507.24,3697.4 1513.47,3703.63 1546.9,3703.63 1563.06,3719.8 1650.52,3719.8 1675.31,3695 U4.5@1684.17,3695 1693.03,3695 1699.83,3688.2 1699.83,3679.35 1725,3654.17 v1(1725,3565) ; U8.5@1527.4,2207.76 1527.4,2216.61 1552.2,2241.41 1552.2,2379.1 1537.4,2393.9 U6.5@1537.4,2402.76 1537.4,2445.83 1562.2,2470.62 1562.2,2574.1 1532.4,2603.9 U3.5@1532.4,2612.76 1592.76,2612.76 1650,2670 1650,2797.76 1635,2797.76 ; U1.5@1532.4,2797.76 1635,2797.76 ; U20.5@1535,4295 1588.48,4295 1633.48,4340 1730,4340 1741.59,4328.41 1741.59,4299.2 1748.39,4292.4 U22.5@1757.24,4292.4 1766.1,4292.4 1784.35,4310.65 ; U21.5@1619.44,4797.4 1610.58,4797.4 1588.18,4775 1490,4775 ; v1(1780,4710) 1760,4730 1760,4762.96 1778.79,4781.75 1778.79,4790.61 1785.58,4797.4 U23.5@1794.44,4797.4 1803.3,4797.4 1810.1,4804.2 1810.1,4836.44 1836.2,4862.54 1836.2,4870.89 1862.75,4897.44 1915.11,4897.44 1925.54,4887.01 1925.54,4844.58 1961.54,4808.58 1961.54,4801.79 1968.34,4795 U25.5@1977.2,4795 ; v1(1810,4355) 1810,4350 1784.35,4324.35 1784.35,4310.65 ; U7.5@1845,3695 1852.09,3695 U7.5@1854.49,3697.4 1863.35,3697.4 1870.14,3704.2 1870.14,3713.06 1880,3722.91 1880,3742.97 1887.03,3750 1960.79,3750 2013.39,3697.4 U9.5@2022.24,3697.4 2023.44,3696.2 2088.8,3696.2 v1(2090,3695) ; U11.5@2160,2810 2160,2801.14 2166.8,2794.35 2194.08,2794.35 ; U26.5@2202.24,4297.4 2193.39,4297.4 2140.79,4350 1995,4350 1984.49,4339.49 U24.5@1984.49,4292.4 1975.63,4292.4 1932.83,4335.2 1855.92,4335.2 1831.37,4310.65 1784.35,4310.65 ; v1(2205,2220) 2205,2226.14 2155,2276.14 U17.5@2155,2285 2197.93,2285 2257,2344.07 2257,2420.33 2223.61,2453.72 2164.2,2453.72 U15.5@2157.4,2460.51 2195.51,2460.51 2258.46,2523.46 2258.46,2611.54 2235.56,2634.44 2165.72,2634.44 U13.5@2162.4,2637.76 2162.4,2646.61 2169.2,2653.41 2198.41,2653.41 2235,2690 2235,2753.43 2194.08,2794.35 ; v1(2230,4930) 2450,4930 P3.2@2515,4865 2575,4925 2720,4925 2795,4850 2795,4558.86 C4.2@2800,4553.86 2802.32,4556.18 C5.2@2940,4556.18 3083.7,4556.18 C6.2@3085,4557.48 ; U18.5@2787.4,2238.07 2787.4,2246.93 2830.2,2289.72 2830.2,2381.26 2790,2421.46 U16.5@2790,2430.31 2850,2490.31 2850,2610 2834.17,2625.83 ; U14.5@2787.4,2625.83 2834.17,2625.83 ; U12.5@2787.4,2843.07 2787.4,2834.21 2834.17,2787.44 ; v1@2835,2830 2834.17,2829.17 2834.17,2787.44 ; v1(3380,2090) 3386.5,2096.5 3386.5,2133 3427.4,2173.9 U34.5@3427.4,2182.76 3427.4,2191.62 3452.2,2216.41 3452.2,2319.61 3427.4,2344.41 U32.5@3427.4,2372.76 3427.4,2381.62 3452.2,2406.41 3452.2,2493.87 3422.4,2523.66 U30.5@3422.4,2572.76 3422.4,2581.62 3465.2,2624.41 3465.2,2701.32 3424.42,2742.1 3424.2,2742.1 3417.4,2748.9 U28.5@3417.4,2757.76 ; v1(3915,2265) 3950,2300 3965.79,2300 4005.65,2339.86 4037.89,2339.86 4044.68,2346.65 U31.5@4044.68,2355.51 4044.68,2364.37 4069.48,2389.17 4069.48,2476.62 4044.68,2501.42 U29.5@4044.68,2558.27 4044.68,2567.13 4087.48,2609.92 4087.48,2698.51 4042.09,2743.9 U27.5@4042.09,2752.76 ; v1(4015,2070) 4015,2116.97 4044.68,2146.65 U33.5@4044.68,2155.51 ; 1635,2797.76 1635,2910 v1(1720,2995) 1889.54,2995 1924.54,3030 2120.46,3030 2133.46,3017 2172.73,2977.73 2172.73,2943.18 2194.08,2921.83 2194.08,2794.35 ; 2834.17,2625.83 2834.17,2787.44
  Bottom Layer w10: v1(1430,4745) 1530,4745 1560,4715 ; v1(1720,2995) v1@1720,3560 ; v1(1725,3565) 1470,3820 1470,4625 1560,4715 ; v1(1810,4355) 1810,4680 v1(1780,4710) 1780,4821.81 1758.44,4843.37 1758.44,4944.35 1769.09,4955 ; v1@2085,3680 v1@2105,3680 ; v1(2090,3695) 2090,3747.37 1890,3947.37 1890,4245 2230,4585 v1(2230,4930) 2215,4945 2075,4945 2055,4965 1930,4965 1929.56,4965.44 1779.53,4965.44 1769.09,4955 ; v1(2205,2220) 2199.09,2220 2149,2169.91 2149,2091 2240,2000 2695,2000 ; v1(2845,2840) 2846,2839 2846,2151 2695,2000 ; v1(3380,2090) 3290,2000 3175,2000 ; v1(3915,2265) 3915,2170 v1(4015,2070) 3805.54,1860.54 3429.46,1860.54 3395,1895 3280,1895 3175,2000 ; 1560,4715 1668.83,4823.83 1668.83,4873.83 1750,4955 1769.09,4955 ; 2695,2000 3175,2000
ADCCLK: U5.1 U10.31 | length 1257.2
  Top Layer w12: v1(2300,3600) 2360.83,3539.17 U5.1@2360.83,3500.75 ; U10.31@2805.16,4069.29 2805.16,4264.88 2815,4274.72 v1(2815,4285)
  Bottom Layer w10: v1(2300,3600) 2300,3795 2790,4285 v1(2815,4285)
ADCCS: U5.8 U10.28 | length 1580.8
  Top Layer w12: v1(2255,3285) 2291.61,3321.61 U5.8@2360.83,3321.61 ; U10.28@2864.21,4069.29 2864.21,4124.21 v1(2975,4235)
  Bottom Layer w10: v1(2255,3285) 2334,3364 2334,3401.37 2882,3949.37 2882,4142 v1(2975,4235)
ADCEOC: U5.4 U10.32 | length 1270.3
  Top Layer w12: v1@2220,3430 2220,3427.67 2249.67,3398 2280.33,3398 2305.96,3423.64 2360.49,3423.64 U5.4@2360.83,3423.98 ; v1(2765,4185) 2765,4174.72 2785.47,4154.25 U10.32@2785.47,4069.29
  Bottom Layer w10: v1(2210,3435) 2765,3990 v1(2765,4185)
ADCMISO: U5.5 U10.29 | length 1546.7
  Top Layer w12: v1@2220,3375 2230,3365 2272.78,3365 2305.83,3398.05 2360.49,3398.05 U5.5@2360.83,3398.39 ; U10.29@2844.53,4069.29 2844.53,4159.53 v1(2920,4235)
  Bottom Layer w10: v1(2215,3380) 2290,3380 2866,3956 2866,4181 v1(2920,4235)
ADCMOSI: U5.3 U10.30 | length 1310.3
  Top Layer w12: v1(2265,3435) 2275.28,3435 2289.85,3449.57 U5.3@2360.83,3449.57 ; U10.30@2824.84,4069.29 2824.84,4194.56 2850,4219.72 v1(2850,4230)
  Bottom Layer w10: v1(2265,3435) 2850,4020 v1(2850,4230)
GND: *.1 *.16 *.26 *.45 *.48 *.50 *.51 C1.1 C2.1 C3.1 C4.1 C5.1 C6.1 C7.1 C8.1 C9.1 C10.1 C11.1 C12.1 C13.2 C14.1 C15.1 P3.1 P?.3 P?.5 R3.1 R5.1 R21.1 R23.1 R42.1 R43.1 R62.1 R64.1 SD1.6 SD1.11 SD1.12 U5.6 U5.18 U5.20 U5.22 U10.18 U10.35 U10.42
Net*_2: *.2 P15.1 | length 2528.6
  Top Layer w12: *.2@3995,3510 4047.22,3510 4067.22,3490 4160,3490 v1(4185,3465) ; v1(4255,4060) 4280,4085 P15.1@4280,4320
  Bottom Layer w10: v1(4185,3465) 4179.09,3470.91 4179.09,3505 4129,3555.09 4129,3584.91 4150.09,3606 4179.91,3606 4190.46,3595.46 4199.79,3595.46 4293.25,3502 4393.17,3502 4433,3541.83 4433,3917.91 4349.78,4001.13 4313.87,4001.13 v1(4255,4060) 4218.67,4023.67 4124.67,4023.67 4096,3995 4096,3985.09 4074.91,3964 4000.46,3964 3959.46,4005 3920.91,4005 3901.91,3986 3890.09,3986 3869,3964.91 3869,3935.09 3890.09,3914 3986.91,3914 4195.91,3705 4200,3705
Net*_3: *.3 P15.9 | length 2232.2
  Top Layer w12: *.3@3995,3560 4010.75,3560 4031.03,3539.72 4042.96,3539.72 4071.67,3511 4106,3511 4110,3515 4191.84,3515 4224.41,3547.57 4224.41,3625.59 4204.57,3645.43 4152.25,3645.43 4123,3674.67 4123,3725.6 4162,3764.6 4162,3978 4130,4010 4070,4010 v1(4060,4000) ; P15.9@4280,4713.7 4270.16,4713.7 4242.41,4741.45 4242.41,4792.41 4250,4800 4362.33,4800 4410,4752.33 4410,4391.69 4317.21,4298.9 4317.21,4162.79 v1(4360,4120)
  Bottom Layer w10: v1(4060,4000) 4180,4120 v1(4360,4120)
Net*_4: *.4 P15.10 | length 2000.3
  Top Layer w12: v1(3710,4000) 3710,3920.46 3785,3845.46 3785,3832.22 3827.65,3789.57 3827.65,3759.2 3956.65,3630.2 3959.05,3630.2 3979.25,3610 *.4@3995,3610 ; P15.10@4280,4762.91 4347.09,4762.91 v1(4365,4745)
  Bottom Layer w10: v1(3710,4000) 3674.4,4035.6 3674.4,4044.4 3751,4121 3775.09,4121 3815.09,4161 3844.91,4161 3866,4139.91 3866,4118.09 3910.09,4074 4083.09,4074 4409,4399.91 4409,4698.43 4365,4742.43 v1(4365,4745)
Net*_5: *.5 P13.1 | length 1355.4
  Top Layer w12: *.5@3995,3660 4075,3660 v1(4165,3570) ; P13.1@4281.73,2650.39 4282.13,2650 v1(4355,2650)
  Bottom Layer w10: v1(4165,3570) 4272.33,3462.67 4307.33,3462.67 4422,3348 4422,2717 v1(4355,2650)
Net*_6: *.6 P13.2 | length 1610.9
  Top Layer w12: v1(3885,3780) 3943.28,3721.72 3983.28,3721.72 *.6@3995,3710 ; v1(4200,2755) 4216.5,2755 4271.89,2699.61 P13.2@4281.73,2699.61
  Bottom Layer w10: v1@3880,3785 3875,3780 3768.83,3780 3708,3719.17 3708,3247 v1(4200,2755)
Net*_7: *.7 P13.3 | length 1465.9
  Top Layer w12: *.7@3995,3760 4010.75,3760 4031.03,3739.72 4033.44,3739.72 4085.33,3687.82 4085.33,3686.89 4144.79,3627.43 4174.9,3627.43 4206.41,3595.92 4206.41,3555.03 4184.38,3533 4146.3,3533 4131.3,3548 v1(4087,3548) ; P13.3@4281.73,2748.82 4291.57,2748.82 4332.76,2790 v1(4370,2790)
  Bottom Layer w10: v1(4087,3548) 4088.54,3546.46 4088.54,3506.46 4394,3201 4394,3174.91 4406,3162.91 4406,2826 v1(4370,2790)
Net*_10: *.10 P13.4 | length 1907.4
  Top Layer w12: *.10@3995,3910 4075,3910 v1(4125,3960) ; P13.4@4281.73,2798.03 4271.89,2798.03 4163,2906.92 4163,3114.67 4050.64,3227.03 4050.64,3236.97 4057.67,3244 4174.18,3244 4317.21,3387.04 4317.21,3412.49 4448,3543.28 4448,3802 4365,3885 v1(4365,3935)
  Bottom Layer w10: v1@4123.82,3958.82 4147.63,3935 v1(4365,3935)
Net*_11: *.11 P13.5 | length 2811.2
  Top Layer w12: v1(3905,3950) 3910,3955 3990,3955 *.11@3995,3960 ; P13.5@4281.73,2847.24 4291.57,2847.24 4332.06,2887.73 4362.73,2887.73 v1(4370,2895)
  Bottom Layer w10: v1(3905,3950) 3907,3948 4072,3948 4401,3619 4401,3555.09 4379.91,3534 4309.54,3534 4205.54,3638 4115.83,3638 4032.83,3721 3841.06,3721 3821.06,3741 3775.09,3741 3754,3719.91 3754,3690.09 3778.54,3665.54 3860.46,3665.54 3885,3641 3919.91,3641 4071,3489.91 4378,3182.91 4378,3123 4386,3115 4386,3055.09 4378,3047.09 4378,2995.37 4376,2993.37 4376,2901 v1(4370,2895)
Net*_12: *.12 P13.6 | length 1833.6
  Top Layer w12: v1(3840,3855) 3840,3940 3910,4010 *.12@3995,4010 ; P13.6@4281.73,2896.46 4291.57,2896.46 4340,2944.88 v1(4340,2990)
  Bottom Layer w10: v1(3840,3855) 3860.91,3855 3921,3794.91 3921,3793.46 3922.23,3792.23 3922.23,3766.32 3899.91,3744 3840.69,3744 3827.69,3757 3768.46,3757 3724,3712.54 3724,3440.09 4020.09,3144 4186,3144 v1(4340,2990)
Net*_13: *.13 C14.2 | length 132.6
  Top Layer w12: *.13@3995,4060 4006.72,4048.28 4113.28,4048.28 C14.2@4120,4055
Net*_14: *.14 P15.8 | length 908.4
  Top Layer w12: v1(3925,4110) *.14@3995,4110 ; v1(4165,4395) 4165,4559.33 4270.16,4664.49 P15.8@4280,4664.49
  Bottom Layer w10: v1(3925,4110) 4096.46,4110 4202,4215.54 4202,4358 v1(4165,4395)
Net*_15: *.15 P15.7 | length 637.5
  Top Layer w12: *.15@3995,4160 4006.72,4171.72 4041.43,4171.72 4059.72,4190 v1(4070,4190) ; v1(4110,4320) 4105,4315 4110,4315 4137.33,4315 4202,4379.67 4202,4570.87 4246.4,4615.28 P15.7@4280,4615.28
  Bottom Layer w10: v1@4060,4210 4061.52,4210 4070,4218.48 4070,4280 v1(4110,4320)
Net*_18: *.18 P14.6 | length 901.6
  Top Layer w12: *.18@3848.94,4247.4 3860.65,4235.69 3860.65,4217.53 3868.19,4210 3869.22,4210 3869.22,4208.97 3876.25,4201.94 3921.62,4201.94 3928.65,4208.97 3928.65,4221.97 3946.4,4239.72 4033.44,4239.72 4044.15,4229 4093.33,4229 4180,4142.33 4180,3802.8 4270.16,3712.64 P14.6@4280,3712.64
Net*_20: *.20 P15.2 | length 804.8
  Top Layer w12: v1(3710,4325) 3710,4318.63 3737.22,4291.41 3737.22,4259.12 *.20@3748.94,4247.4 ; v1(4035,4340) 4037.67,4340 4094.67,4283 4133,4283 4219.21,4369.21 P15.2@4280,4369.21
  Bottom Layer w10: v1(3710,4325) 3766,4381 3858.3,4381 3932.3,4307 3980.54,4307 4028.02,4354.48 v1@4038.75,4343.75
Net*_21: *.21 P15.3 | length 1759.3
  Top Layer w12: v1(3395,4395) 3395,4498.24 3519.76,4623 3658,4623 v1(3710,4675) ; v1(3585,4175) 3644.69,4175 3678.74,4209.05 3678.74,4211.45 3698.94,4231.65 *.21@3698.94,4247.4 ; P15.3@4280,4418.42 4280.17,4418.59 4323.59,4418.59 v1@4335,4430
  Bottom Layer w10: v1(3395,4395) 3585,4205 v1(3585,4175) ; v1(3710,4675) 3730,4695 3849.14,4695 3855,4689.14 3855,4674.09 4050.09,4479 4096,4479 4140,4435 v1(4340,4435)
Net*_22: *.22 P15.4 | length 1135.4
  Top Layer w12: v1(3645,4320) 3648.94,4316.06 *.22@3648.94,4247.4 ; v1(4030,4400) 4036.27,4406.27 4036.27,4538.73 v1@4035,4540 ; P15.4@4280,4467.64 4289.84,4467.64 4317.2,4495 v1(4350,4495)
  Bottom Layer w10: v1(3645,4320) 3730,4405 3773.46,4405 3781.46,4397 3878,4397 3911.39,4363.61 3911.39,4352.7 3940.09,4324 3969.91,4324 3991,4345.09 3991,4347.88 4030,4386.88 v1(4030,4400) ; v1(4035,4545) 4085,4495 v1(4350,4495)
Net*_23: *.23 P15.5 | length 1821.9
  Top Layer w12: v1(3336,4431) 3377,4472 3377,4546.72 3400,4569.72 v1(3400,4580) 3451.31,4580 3512.31,4641 3586.51,4641 3674.78,4729.27 3833.4,4729.27 3882.67,4680 v1(4010,4680) ; v1@3580,4320 3598.94,4301.06 *.23@3598.94,4247.4 ; P15.5@4280,4516.85 4287.02,4523.87 4326.55,4523.87 4365.67,4563 v1(4373,4563)
  Bottom Layer w10: v1(3336,4431) 3409.91,4431 3520.91,4320 v1(3585,4320) ; v1(4010,4680) 4345.91,4680 4376,4649.91 4376,4566 v1(4373,4563)
Net*_24: *.24 P15.6 | length 1868.3
  Top Layer w12: v1(3260,4405) 3260,4459.54 3335,4534.54 3335,4590 3345,4600 3367.67,4600 3426.67,4659 3571.5,4659 3659.77,4747.27 3867.73,4747.27 v1(3875,4740) ; v1(3480,4175) 3494.69,4175 3528.65,4208.97 3528.65,4211.37 3548.94,4231.65 *.24@3548.94,4247.4 ; P15.6@4280,4566.06 4316.06,4566.06 4340,4590 v1(4340,4635)
  Bottom Layer w10: v1@3260,4395 v1(3480,4175) ; v1(3875,4740) 3980,4635 v1(4340,4635)
Net*_29: *.29 P12.8 | length 2332.8
  Top Layer w12: *.29@3400.51,4061.97 3485.25,4061.97 3576.21,3971.01 3581.77,3971.01 3674.78,3878 3674.78,3840.22 v1(3680,3835) ; v1@4220,2485 4220,2465 4282.5,2402.5 4282.5,2365.75 4335.59,2312.66 4335.59,2231.81 4289.84,2186.06 P12.8@4280,2186.06
  Bottom Layer w10: v1(3680,3835) 3680,3030 v1(4215,2495)
Net*_30: *.30 P14.5 | length 1266.5
  Top Layer w12: *.30@3400.51,4011.97 3451.98,4011.97 3461.67,4002.27 3487.97,4002.27 3487.97,3997.03 v1(3495,3990) ; v1@3570,4060 3615,4060 3680,4125 v1(3830,4125) ; v1(4160,3690) 4160,3679.72 4171.57,3668.14 4171.57,3663.43 P14.5@4280,3663.43
  Bottom Layer w10: v1(3495,3990) v1(3565,4060) ; v1(3830,4125) 3830,4023.89 3803.06,3996.94 3803.06,3978.4 3883.46,3898 3952,3898 v1(4160,3690)
Net*_31: *.31 P14.2 | length 1554.4
  Top Layer w12: *.31@3400.51,3961.97 3409.48,3953 3574.33,3953 3612,3915.33 3612,3845.33 3635.1,3822.23 3635.1,3454.9 3770,3320 3842.67,3320 3864.67,3298 4123,3298 4242.41,3417.41 4242.41,3487.29 4249.44,3494.32 4280,3494.32 P14.2@4280,3515.79